# Altium PCB Sensor_Box_Hub_SAMD21.PCBDOC (part 2 of 3)
Units mm, origin at the board's own origin, x right, y up, seen from the top; angles counter-clockwise.
Board outline 33.7 x 72.8 mm, 2 copper layers (Top, Bot), stack 1.571 mm thick; 108 components, 111 nets, 446 pads, 221 vias.
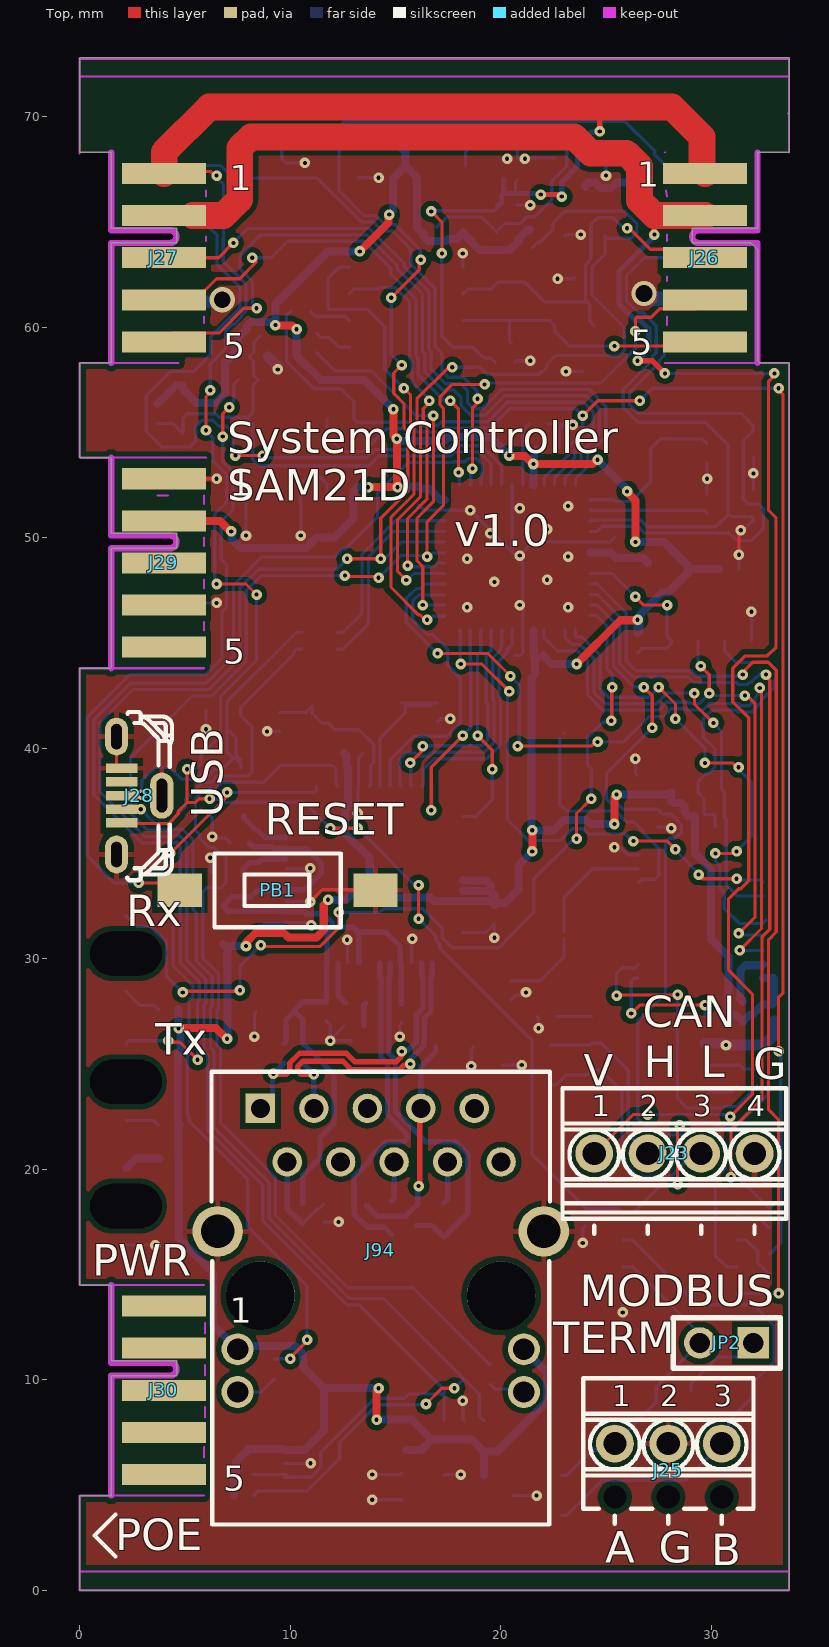
[diagram p0: Top view]

## Part data (continued)
R125 R126 R262: library part R0402_330R_1%_0.0625W_100PPM, "Resistor - 1%", Case=0402, Manufacturer=GENERIC, Manufacturer1 ComponentHeight=0.4mm, Manufacturer1 Example="YAGEO PHYCOMP", Manufacturer1 Part Number=232270673301L, Power=0.0625W, Tolerance=±1%, Author="CERN DEM JLC", Component Type=Standard, CreateDate=03.12.2007, HelpURL=\\cern.ch\dfs\Applications\Altium\Datasheets\R0402_Phycomp_RC0402.pdf, LatestRevisionDate=17.10.2012, Manufacturer Part Number=R0402_330R_1%_0.0625W_100PPM, Mounted=Yes, Part Description="General Purpose Thick Film Chip Resistor", Part Number=R0402_330R_1%_0.0625W_100PPM, Pin Count=2, PressFit=No, Sense=No, SMD=Yes, Socket=No, Status="Not Recommended", TC=±100ppm/°C
R127: library part R0402_12K1_1%_0.0625W_100PPM, "Resistor - 1%", Case=0402, Manufacturer=GENERIC, Manufacturer1 ComponentHeight=0.4mm, Manufacturer1 Example="YAGEO PHYCOMP", Manufacturer1 Part Number="232270671213L or RC0402FR-0712K1L", Power=0.0625W, Tolerance=±1%, Author="CERN DEM JLC", Component Type=Standard, CreateDate=24.10.2012, HelpURL=\\cern.ch\dfs\Applications\Altium\Datasheets\R0402_Phycomp_RC0402.pdf, LatestRevisionDate=24.10.2012, Manufacturer Part Number=R0402_12K1_1%_0.0625W_100PPM, Mounted=Yes, Part Description="General Purpose Thick Film Chip Resistor", Part Number=R0402_12K1_1%_0.0625W_100PPM, Pin Count=2, PressFit=No, Sense=No, SMD=Yes, Socket=No, Status="Not Recommended", TC=±100ppm/°C
R130: library part R0402_10R_1%_0.0625W_200PPM, "Resistor - 1%", Case=0402, Manufacturer=GENERIC, Manufacturer1 ComponentHeight=0.4mm, Manufacturer1 Example="YAGEO PHYCOMP", Manufacturer1 Part Number=232270671009L, Power=0.0625W, Tolerance=±1%, Author="CERN DEM JLC", Component Type=Standard, CreateDate=24.06.2009, HelpURL=\\cern.ch\dfs\Applications\Altium\Datasheets\R0402_Phycomp_RC0402.pdf, LatestRevisionDate=17.10.2012, Manufacturer Part Number=R0402_10R_1%_0.0625W_200PPM, Mounted=Yes, Part Description="General Purpose Thick Film Chip Resistor", Part Number=R0402_10R_1%_0.0625W_200PPM, Pin Count=2, Sense=No, SMD=Yes, Socket=No, Status="Not recommended", TC=±200ppm/°C
T24: "N-CHANNEL MOSFET WITH DIODE", Case=SOT23-3, Manufacturer="ON SEMICONDUCTOR", Author="CERN DEM JLC", Bonding=No, ComponentHeight=1.11mm, Component Type=Standard, CreateDate=23.03.2009, Device=BSS138LT1G, HelpURL=\\cern.ch\dfs\Applications\Altium\Datasheets\BSS138LT1G.pdf, LatestRevisionDate=23.03.2009, Manufacturer Part Number=BSS138LT1G, Mounted=Yes, PackageDescription="SOT23 3-Leads, Pitch 0.95mm - Body 1.4x3mm, IPC Medium Density", Part Description="50V 200mA N-Channel Enhancement Mode Field-Effect Transistor", Part Number=BSS138LT1G, Pin Count=3, PressFit=No, Sense=No, SMD=Yes, Socket=No
X1: library part X_CRYSTAL_SMD_5.0*3.2, "miniature crystal oscillator (Maritex)"

## Via types
v1: diameter 0.5, hole 0.2, Top to Bot, tented both sides, 217 vias
v2: diameter 0.5, hole 0.2, Top to Bot, 2 vias
v3: diameter 1.2, hole 0.8, Top to Bot, tented both sides, 2 vias

## Nets (pads, with @x,y where several pads share a name; then routed paths per layer and width w, separated by ;. In a path a pad name is that pad's centre, name@x,y a point inside that pad or via, vN(x,y) a via of type N, cw(c..) or ccw(c..) an arc to the next point about the centre after c; other vN are vias at no path point)
CAN_CSn: IC11.18 IC13.28 | length 39.8
  Top w0.152: v1(17,44.5) 19.391,44.5 v1(20.462,43.429) ; v1(20.8,40.1) 24.306,40.1 24.506,40.3 v1(24.6,40.3) ; v1(31.35,30.4) 32.388,31.438 32.388,42.682 32.3,42.77 v1(32.3,42.864)
  Bot w0.152: v1(17,44.5) 16.992,44.5 15.517,45.975 15.517,47.124 15.976,47.583 16.183,47.583 16.4,47.8 IC13.28@17.35,47.8 ; v1(20.462,43.429) 20.879,43.012 20.879,40.273 20.8,40.194 v1(20.8,40.1) ; v1(24.6,40.3) 25.846,40.3 27.053,41.507 27.73,41.507 28.102,41.879 28.813,41.879 28.875,41.817 29.609,41.817 29.913,42.121 31.302,42.121 31.402,42.021 31.798,42.021 32.079,42.302 32.079,42.402 32.233,42.557 32.233,42.797 v1(32.3,42.864) ; v1(31.35,30.4) 31.363,30.388 32.437,30.388 IC11.18@32.45,30.375
CAN_INT: IC11.13 IC13.24 | length 24.7
  Top w0.152: v1(18.1,44) 19.1,44 v1(20.4,42.7) ; v1(26.3,35.588) 27.912,35.588 v1(28.3,35.2) ; v1(29.4,34) 29.6,33.8 v1(31.2,33.8)
  Bot w0.152: IC13.24@18.05,45.6 18.075,45.575 18.075,44.025 v1(18.1,44) ; v1(20.4,42.7) 20.4,42.606 20.321,42.527 20.321,36.602 21.302,35.621 22.845,35.621 23.402,36.179 23.912,36.179 24.169,35.921 25.935,35.921 26.3,35.557 v1(26.3,35.588) ; v1(28.3,35.2) 28.3,35.15 29.45,34 v1(29.4,34) ; v1(31.2,33.8) 31.2,33.767 31.167,33.733 32.342,33.733 IC11.13@32.45,33.625
CAN_MISO: IC11.17 IC13.16 IC14.2 | length 28.2
  Top w0.152: v1(29.5,43.9) 29.5,43.89 29.9,43.49 v1(29.9,42.6) ; v1(31.3,31.2) 32.083,31.983 32.083,42.117 31.7,42.5 v1(31.6,42.5)
  Bot w0.152: IC13.16@22.05,45.6 22.05,45.265 22.698,44.617 23.66,44.617 24.121,44.156 24.121,42.54 24.849,41.812 27.52,41.812 27.891,42.183 28.94,42.183 29.002,42.121 29.421,42.121 v1(29.9,42.6) 30,42.5 v1(31.6,42.5) ; 29.365,44.11 IC14.2@29.365,45.1 ; v1(31.3,31.2) 31.366,31.133 32.342,31.133 IC11.17@32.45,31.025
CAN_MOSI: IC11.16 IC13.13 IC14.5 | length 23.5
  Top w0.152: v1(27.5,42.9) 28.3,42.1 v1(28.3,41.4) ; v1(29.7,39.3) 31.006,39.3 31.206,39.1 v1(31.3,39.1) ; v1(30.2,35) 31.1,35 v1(31.2,35.1)
  Bot w0.152: IC13.13@23.55,45.6 23.55,45.34 23.618,45.272 23.867,45.272 24.73,44.409 24.73,42.793 25.102,42.421 27.021,42.421 v1(27.5,42.9) ; v1(28.3,41.4) 29.7,40 v1(29.7,39.3) ; v1(30.2,35) 30.2,34.631 30.412,34.419 30.412,33.38 30.621,33.171 30.621,32.379 31.321,31.679 32.446,31.679 IC11.16@32.45,31.675 IC11.16@32.599,31.824 ; v1(31.2,35.1) 31.905,35.805 IC14.5@31.905,37.9 31.905,38.4 31.366,38.939 31.366,39.033 v1(31.3,39.1)
CAN_SCK: IC11.14 IC13.14 IC14.6 | length 20.6
  Top w0.152: v1(29.2,42.6) 29.2,42.1 v1(30.1,41.2)
  Bot w0.152: IC13.14@23.05,45.6 23.05,45.265 23.393,44.921 23.786,44.921 24.426,44.282 24.426,42.667 24.976,42.117 27.393,42.117 27.903,42.626 29.174,42.626 v1(29.2,42.6) ; v1(30.1,41.2) 30.483,40.817 30.483,38.052 IC14.6@30.635,37.9 30.621,37.886 30.621,36.742 30.709,36.655 30.709,35.2 30.717,35.192 30.717,33.506 31.248,32.975 IC11.14@32.45,32.975
CANH: D1.1 IC10.7 J23.2 | length 8.6
  Bot w0.152: D1.1@22.4,25.9 24.215,25.9 IC10.7@24.3,25.985 24.775,25.985 26.06,24.7 26.06,21.67 J23.2@26.98,20.75
CANL: D1.2 IC10.6 J23.3 | length 12
  Bot w0.152: D1.2@22.4,24 22.625,24 23.116,24.491 24.076,24.491 IC10.6@24.3,24.715 24.775,24.715 25.756,23.734 25.756,20.378 26.513,19.621 28.045,19.621 29.173,20.75 J23.3@29.52,20.75
DEV_RESETn: IC13.29 R20.1 T24.1 | length 37
  Top w0.152: v1(15.517,47.983) 15.095,48.405 15.095,50.856 16.188,51.949 16.188,55.304 16.017,55.475 16.017,56.593 17.457,58.033 17.633,58.033 v1(17.7,58.1)
  Bot w0.152: v1(15.517,47.983) 15.56,47.983 15.877,48.3 IC13.29@17.35,48.3 ; v1(17.7,58.1) 19.007,58.1 19.345,57.761 21.837,57.761 22.196,58.121 22.196,58.245 22.602,58.65 25.173,58.65 25.202,58.621 25.598,58.621 25.879,58.902 25.879,59.973 24.333,61.518 24.333,62.836 24.95,63.453 T24.1@24.95,64.35 25.079,64.221 26.198,64.221 26.479,64.502 26.479,64.898 25.872,65.505 23.032,65.505 22.496,64.97 22.496,64.643 21.905,64.051 21.771,64.051 R20.1@21.5,63.78
EMAC_MDC: J27.8
EMAC_MDIO: J27.10
ETH_RESETn: IC13.22 IC33.37 | length 10.1
  Top w0.152: v1(18.9,40.6) 19.6,39.9 v1(19.6,39)
  Bot w0.152: IC33.37@18.2,36.75 18.8,36.75 19.6,37.55 v1(19.6,39) ; v1(18.9,40.6) 18.9,44.431 19.05,44.581 IC13.22@19.05,45.6
GND: C4.2 C41.1 C42.1 C43.1 C44.2 C45.1 C46.1 C47.2 C48.2 C49.1 C50.2 C51.2 C52.2 C53.2 C54.2 C55.1 C56.2 C105.1 C106.2 C107.2 C108.2 C109.2 C110.2 C111.2 C112.2 C113.2 C114.1 C115.1 C118.2 C119.1 D1.3 D4.3 D5.2 D6.2 D7.2 D10.2 D11.2 D12.1 D39.3 IC2.2 IC2.3 IC2.4 IC2.7 IC10.2 IC11.10 IC12.2 IC12.5 IC13.5 IC13.18 IC13.35 IC13.42 IC13.49 IC14.4 IC15.5 IC17.5 IC17.7 IC33.3 IC33.9 IC33.14 IC33.16 IC33.19 IC33.29 IC33.48 IC52.5 J23.4 J25.2 J26.9 J27.9 J28.5 J28.6 J29.1 J29.9 J94.S1 J94.S2 JP3.3 JP3.5 JP3.9 LD5.1 PB1.1 R57.1 R75.1 R262.2 T24.2 | length 104
  Top w0.152: J28.6@1.75,40.55 1.75,39.199 1.899,39.05 J28.5@2,39.05 ; J29.1@4,52.8 v1(6.5,52.8) ; v1(10.95,32.7) 11.529,33.279 14.021,33.279 PB1.1@14.05,33.25
  Bot w0.152: LD5.1@2.2,16.45 2.25,16.4 v1(3.6,16.4) ; J29.9@4,46.8 4.1,46.9 v1(6.5,46.9) ; J27.9@4,61.3 4.1,61.4 4.3,61.2 4.4,61.3 v3(6.771,61.3) ; v1(6,40.9) D12.1@6,41.8 ; v1(6.2,34.8) 6.2,34.15 C106.2@6.25,34.1 ; C105.1@6.2,36.8 6.3,36.7 v1(6.3,35.8) 6.366,35.734 6.916,35.734 C111.2@7.15,35.5 ; v1(7.9,50.1) 7.9,51.715 JP3.9@7.935,51.75 ; v1(8.3,26.3) 8.3,27.4 C107.2@8.4,27.5 ; C112.2@8.35,31.35 8.35,31.4 8.534,31.584 8.729,31.584 8.821,31.676 9.726,31.676 IC33.14@9.8,31.75 9.823,31.727 10.779,31.727 10.906,31.6 v1(11,31.6) ; v1(8.9,40.8) C114.1@9.5,40.8 ; D10.2@9.6,68.6 9.6,68 9.8,67.8 v1(10.7,67.8) ; IC2.7@9.73,6.017 10.952,6.017 v1(10.97,6.035) ; IC33.16@9.8,32.75 9.825,32.725 10.925,32.725 v1(10.95,32.7) ; IC33.19@9.8,34.25 9.825,34.275 10.925,34.275 v1(10.95,34.3) ; v1(10.5,50.1) 10.5,51.725 JP3.5@10.475,51.75 10.475,52.57 10.779,52.874 11.441,52.874 11.745,52.57 JP3.3@11.745,51.75 ; C118.2@11.6,17.45 11.65,17.5 v1(12.3,17.5) ; C109.2@11.7,27.05 11.9,26.85 v1@11.9,26.147 ; R262.2@12.557,26.804 v1@11.9,26.147 ; v1(12.7,30.9) 12.725,30.875 12.725,29.825 IC33.9@12.75,29.8 ; 12.9,26.1 v1(11.9,26.1) v1@11.9,26.147 ; v1(13.2,36.9) 13.225,36.925 13.225,38.175 IC33.29@13.25,38.2 13.25,39.55 C110.2@13.45,39.75 ; C56.2@13.25,67.1 v1(14.2,67.1) ; v1(13.9,4.3) 15.295,4.3 15.3,4.295 ; v1(13.9,5.5) 15.235,5.5 IC2.3@15.3,5.565 ; v1(15.2,26.3) 15.2,26.85 C113.2@15.3,26.95 ; IC33.3@15.75,29.8 15.775,29.825 15.775,30.925 v1(15.8,30.95) ; C54.2@16.1,51.55 16.334,51.316 17.334,51.316 IC13.35@17.35,51.3 v1(18.55,51.3) IC13.49@20.55,49.3 ; C115.1@17,41.25 17.15,41.4 v1(17.6,41.4) ; IC12.5@17.3,5.45 17.35,5.5 v1(18.1,5.5) ; v1(18.2,9) 18.2,8.1 IC12.2@18.25,8.05 ; IC33.48@18.2,31.25 19.3,31.25 C108.2@19.7,31.65 v1(19.7,31) ; IC52.5@18.2,62.855 v1(18.2,63.5) ; v1(18.6,24.9) 18.6,25.7 C119.1@18.7,25.8 ; D1.3@20.1,24.95 v1(21,24.95) ; C45.1@20.5,28.05 20.734,28.284 20.99,28.284 21.106,28.4 v1(21.2,28.4) ; IC13.42@20.55,52.5 IC13.49@20.55,49.3 ; D4.3@20.6,4.5 v1(21.7,4.5) ; C52.2@20.65,44.4 20.916,44.4 21.05,44.534 IC13.18@21.05,45.6 21.05,48.8 IC13.49@20.8,49.05 ; C4.2@20.65,58.3 20.75,58.4 v1(21.4,58.4) ; C55.1@20.75,65.8 v1(21.4,65.8) ; IC17.5@20.8,69 IC17.7@20.8,68 20.83,68.03 R75.1@22.6,68.03 ; R57.1@21.73,27.25 21.8,27.18 v1(21.8,26.7) ; C49.1@22.25,55.4 23.377,55.4 v1(23.421,55.356) 22.971,55.356 22.964,55.364 22.784,55.184 22.784,54.334 C53.2@22.65,54.2 ; v1(22.7,62.3) 23.45,62.3 D39.3@23.5,62.35 ; T24.2@23.05,64.35 23.1,64.4 v1(23.8,64.4) ; v1(23.1,57.9) D11.2@23.9,57.9 ; v1(23.9,16.5) 23.9,17.2 C42.1@24,17.3 ; D5.2@24.3,68.25 24.425,68.25 25,67.675 v1(25,67.2) ; v1(25.4,35.3) 25.467,35.233 25.742,35.233 26.05,34.925 IC11.10@26.55,34.925 ; C51.2@25.4,50 25.2,49.8 IC13.5@24.25,49.8 21.55,49.8 v1(20.9,49.15) IC13.49@20.8,49.05 ; v1(25.8,13.2) IC15.5@25.8,14.095 ; v1(26.4,39.5) 26.4,38.8 C50.2@26.5,38.7 ; C46.1@27.45,36.25 28.15,36.25 v1(28.1,36.2) ; J26.9@28.2,61.3 27.1,61.3 v3(26.8,61.6) ; C43.1@29.8,52.05 v1(29.8,52.8) C44.2@29.8,53.55 ; IC14.4@31.905,45.1 v1(31.905,46.48) ; D7.2@32,52.3 v1(32,53.05) D6.2@32,53.8 ; IC13.49@20.55,49.3 IC13.49@20.8,49.05 ; v3(26.8,61.6) 26.8,61.9 26.65,61.75 v3(26.8,61.6)
  Bot w0.508: C48.2@8.95,58.6 9.41,58.14 v1(9.41,57.99) ; IC10.2@29.7,25.985 v1@30.615,25.985 ; v1(30.7,25.9) C47.2@31.3,25.9 32.5,25.9 33,26.4 C41.1@33,27.05
  other v1: 18.4,46.7 23.2,46.7 20.9,46.8 19.7,47.9 22.2,48 18.4,49 23.2,49.1 19.5,50.2 22.2,50.4 20.9,51.4 23.2,51.5 20.3,68 21.15,68
GSM_PWR: IC13.41 J27.7 | length 36.2
  Top w0.152: v1(7.4,53.9) v1(8.7,53.9)
  Bot w0.152: J27.7@4,65.3 5.5,65.3 6.021,64.779 6.115,64.779 6.53,64.364 6.53,64.338 6.517,64.324 6.517,62.989 7.6,61.906 7.6,60.9 7.143,60.443 7.119,60.443 6.229,59.553 6.229,58.705 5.412,57.889 4.295,57.889 3.161,56.755 3.161,55.045 3.895,54.311 5.225,54.311 5.513,54.6 5.513,55.29 5.802,55.578 6.327,55.578 6.618,55.288 6.988,55.288 7.279,54.998 7.279,54.115 7.4,53.994 v1(7.4,53.9) ; v1(8.7,53.9) 8.805,53.795 13.641,53.795 14.024,54.178 17.472,54.178 17.662,54.369 19.103,54.369 20.05,53.422 IC13.41@20.05,52.5
INT: IC13.23 IC33.36 | length 10.5
  Top w0.152: v1(16.7,37.05) 16.7,39.1 v1(18.2,40.6)
  Bot w0.152: v1(16.7,37.05) 16.725,37.075 16.725,38.175 IC33.36@16.75,38.2 ; v1(18.2,40.6) 18.579,40.979 18.579,44.198 18.55,44.227 IC13.23@18.55,45.6